# Altium PCB Avalon_ctrlunit.PcbDoc (part 5 of 6)
Units mil, origin at the board's own origin, x right, y up, seen from the top; angles counter-clockwise.
Board outline 3947.62 x 3160.22 mil, 4 copper layers (Top Layer, Mid-Layer 1, Mid-Layer 2, Bottom Layer); 194 components, 260 nets, 936 pads, 465 vias.
Unrouted connection lines stored in the file: 1.
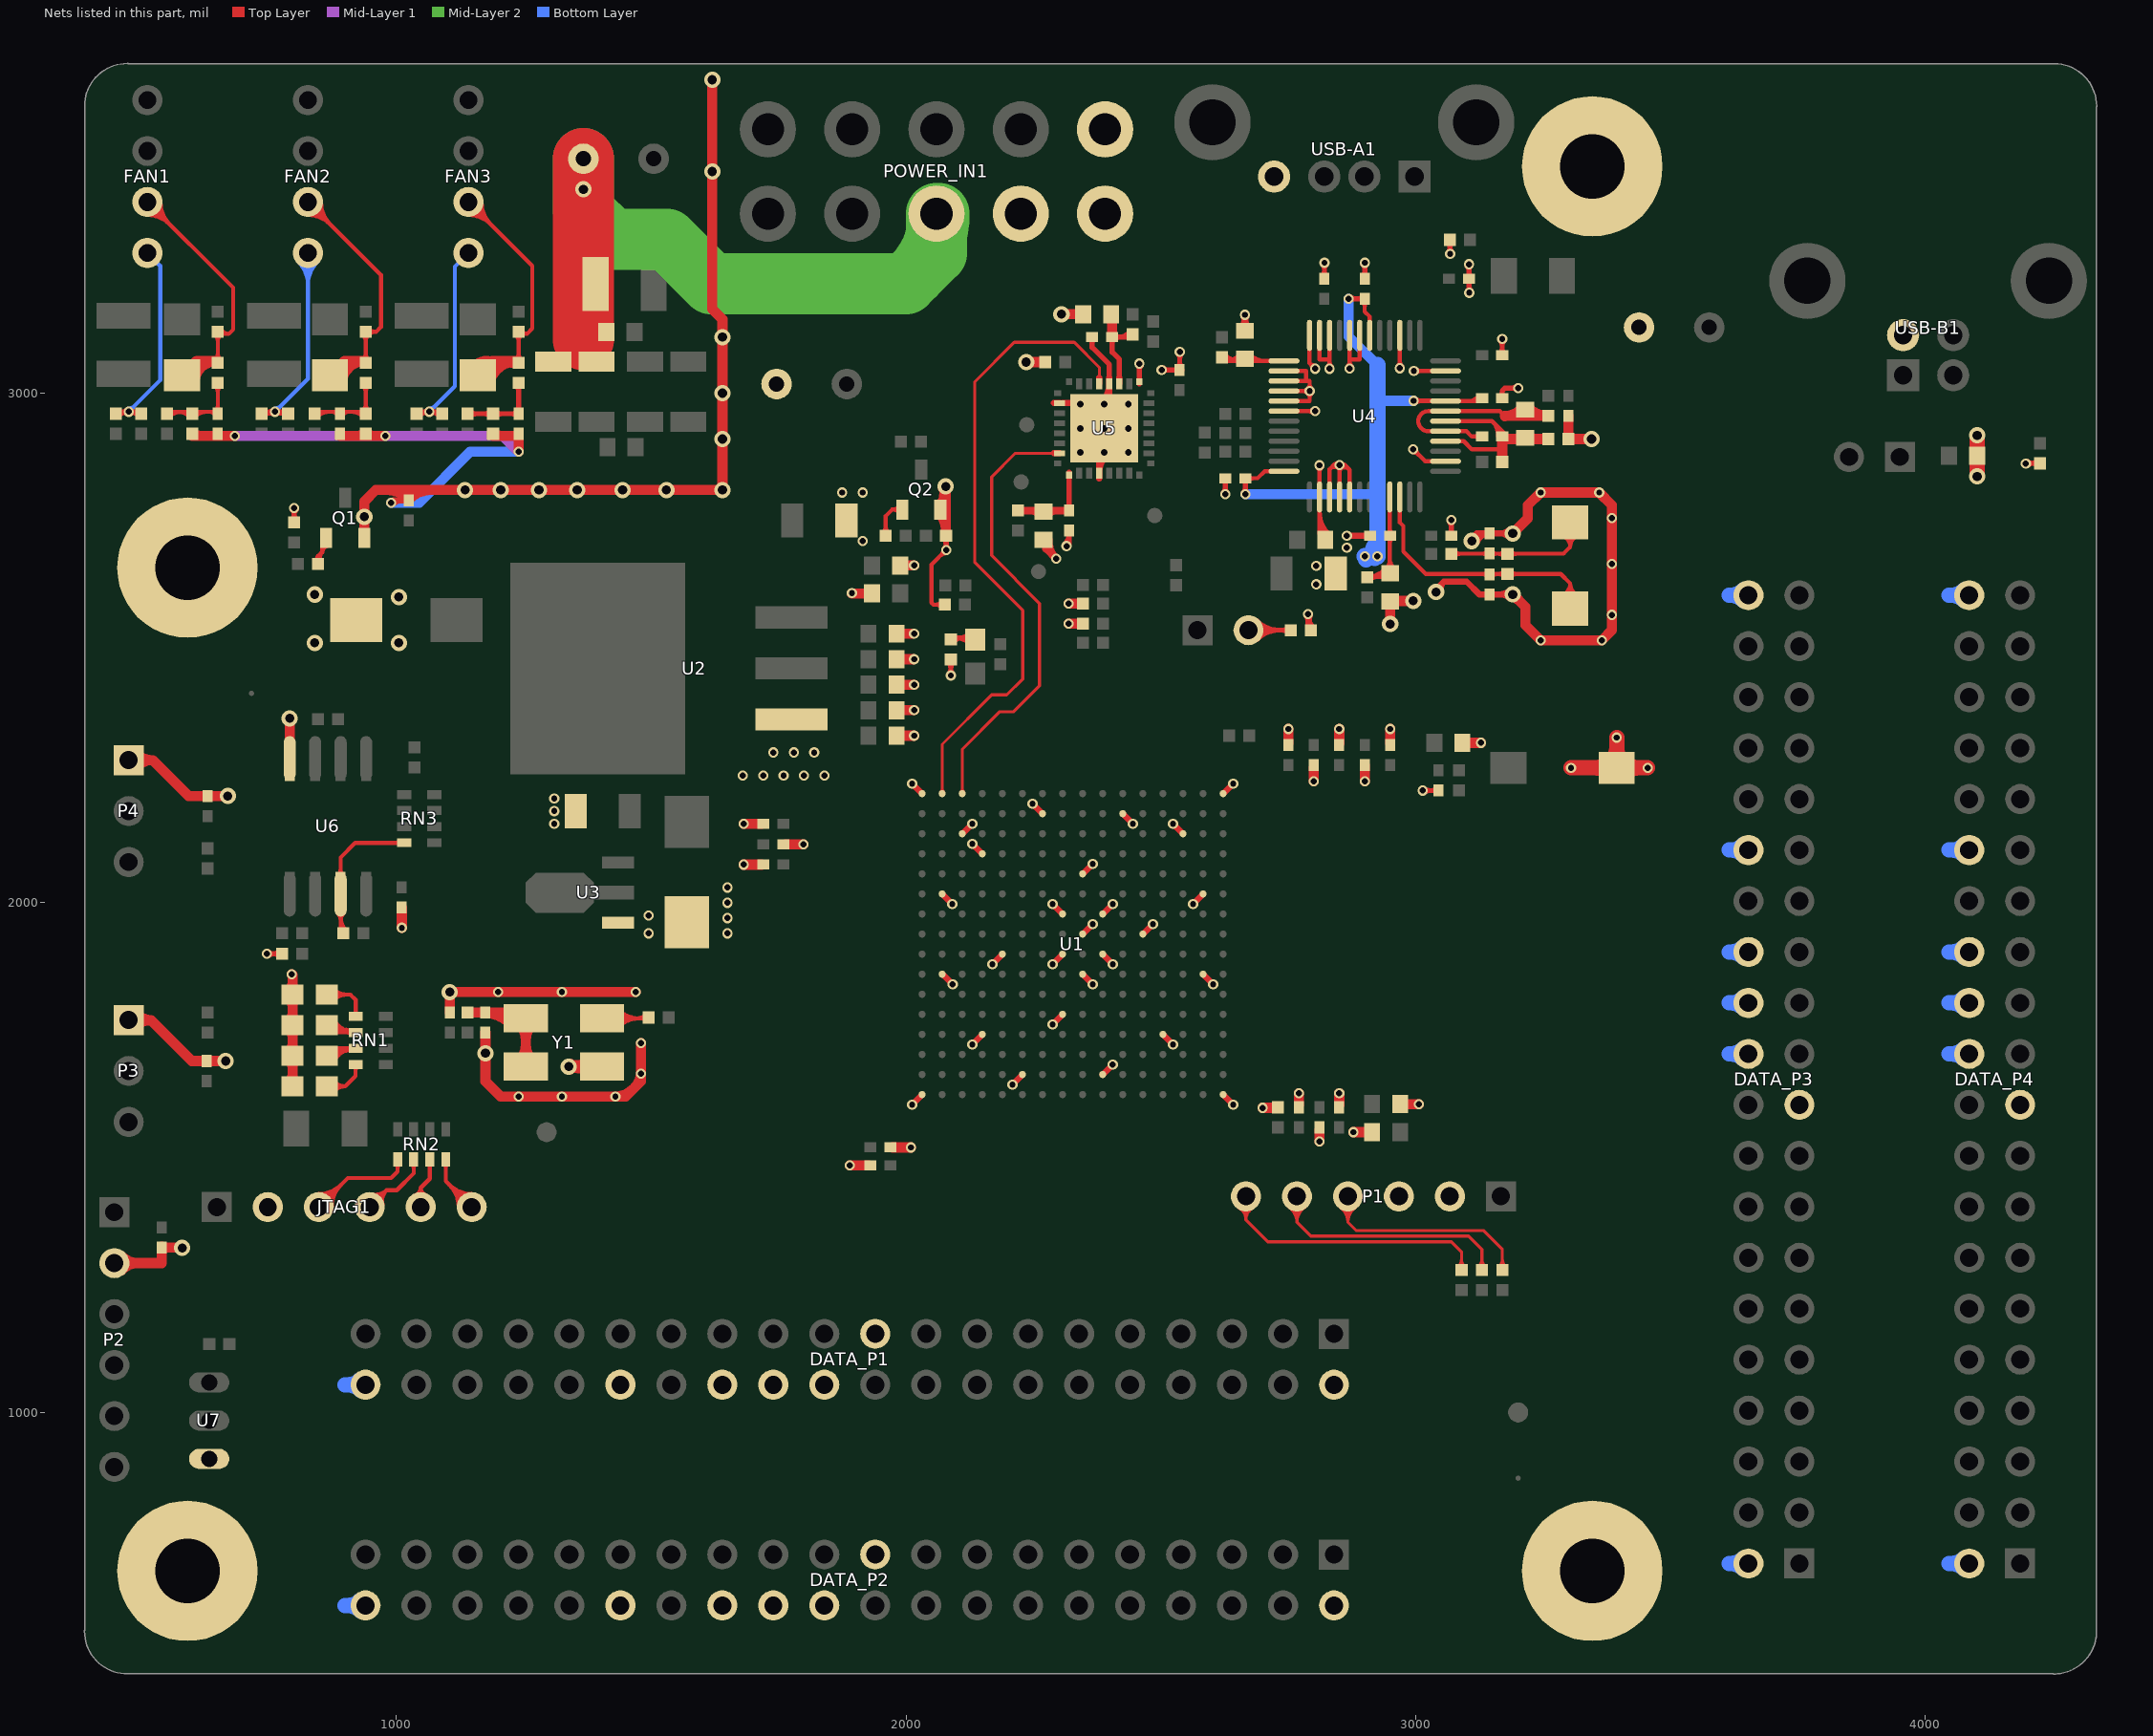
[diagram p7: the nets of this part, all layers, seen from the top]

## Via types
v1: diameter 20, hole 12, Top Layer to Bottom Layer, tented both sides, 334 vias
v2: diameter 32, hole 18, Top Layer to Bottom Layer, tented both sides, 84 vias
v3: diameter 50, hole 28, Top Layer to Bottom Layer, 32 vias
v4: diameter 25.98, hole 12.99, Top Layer to Bottom Layer, tented both sides, 9 vias
v5: diameter 50, hole 28, Top Layer to Bottom Layer, tented both sides, 6 vias

## Nets (pads, with @x,y where several pads share a name; then routed paths per layer and width w, separated by ;. In a path a pad name is that pad's centre, name@x,y a point inside that pad or via, vN(x,y) a via of type N, cw(c..) or ccw(c..) an arc to the next point about the centre after c; other vN are vias at no path point) (continued)
FPGA_T14: U1.T14 U5.31 | length 934.7
  Top Layer w6: U1.T14@2107.64,2217.1 ccw(c2100.81,2223.93) 2110.46,2223.93 ccw(c2120.12,2223.93) U1.T14@2113.29,2217.1 ; U1.T14@2110.46,2214.28 2110.46,2301.58 2183.89,2375 2211.44,2375 2262,2425.56 2262,2587.44 2168,2681.44 2168,2835.8 2214.2,2882 U5.31@2306.46,2882 ; 2288.99,2882 cw(c2288.99,2874.31) U5.31@2294.43,2879.75 ; 2289.94,2882 ccw(c2289.94,2888.34) U5.31@2294.43,2883.86
  Top Layer w11.81: 2290,2882.24 U5.31@2301.54,2882.24
FPGA_T15: U1.T15 U5.21 | length 1301.1
  Top Layer w6: U1.T15@2068.27,2217.1 ccw(c2061.44,2223.93) 2071.09,2223.93 ccw(c2080.75,2223.93) U1.T15@2073.92,2217.1 ; U1.T15@2071.09,2214.28 2071.09,2311.09 2168,2408 2197.77,2408 2229,2439.23 2229,2573.77 2135,2667.77 2135,3022.56 2212.44,3100 2330,3100 2379.29,3050.71 U5.21@2379.29,3014.13 ; U5.21@2377.1,3025.59 ccw(c2371.82,3030.87) 2379.29,3030.87 ; 2379.29,3030.23 ccw(c2385.85,3030.23) U5.21@2381.21,3025.59
  Top Layer w11.81: U5.21@2379.29,3019.05 2379.29,3030.59
GND: C1.2 C2.2 C3.2 C4.2 C5.2 C6.2 C7.2 C8.2 C9.2 C10.2 C11.2 C12.2 C13.2 C14.2 C15.1 C16.1 C17.1 C18.1 C19.1 C20.1 C21.1 C22.1 C23.1 C24.1 C25.1 C26.2 C27.1 C28.1 C29.1 C30.2 C31.1 C32.1 C33.1 C34.1 C35.1 C36.2 C37.2 C38.1 C39.1 C40.1 C43.2 C44.2 C45.1 C46.1 C47.1 C48.1 C49.2 C50.1 C51.1 C52.2 C53.1 C54.1 C55.1 C57.2 C59.1 C60.2 C61.2 C62.2 C64.2 C65.2 C67.1 C68.1 C69.2 C70.1 DATA_P1.2 DATA_P1.19 DATA_P1.22 DATA_P1.24 DATA_P1.26 DATA_P1.30 DATA_P1.40 DATA_P2.2 DATA_P2.19 DATA_P2.22 DATA_P2.24 DATA_P2.26 DATA_P2.30 DATA_P2.40 DATA_P3.2 DATA_P3.19 DATA_P3.22 DATA_P3.24 DATA_P3.26 DATA_P3.30 DATA_P3.40 DATA_P4.2 DATA_P4.19 DATA_P4.22 DATA_P4.24 DATA_P4.26 DATA_P4.30 DATA_P4.40 FB3.2 FB4.2 JTAG1.2 LED1.2 LED2.2 LED3.2 LED4.2 M1.0 M2.0 M3.0 M4.0 P1.2 P1.3 P2.2 P3.1 P4.1 POWER_IN1.5 POWER_IN1.8 POWER_IN1.9 POWER_IN1.10 PROG.1 Q1.2 Q2.2 R4.2 R5.2 R10.1 R13.2 R15.2 R22.1 R30.2 R33.1 R35.1 R36.1 R39.1 R46.2 R55.2 R56.2 R61.2 R66.2 U1.A1 U1.A16 U1.B7 U1.B11 U1.D4 U1.D13 U1.E9 U1.G2 U1.G8 U1.G15 U1.H7 U1.H9 U1.H12 U1.J5 U1.J8 U1.K7 U1.K9 U1.L2 U1.L15 U1.M8 U1.N13 U1.P3 U1.P14 U1.R6 U1.R10 U1.T1 U1.T16 U2.1 U3.1 U4.2 U4.3 U4.4 U4.5 U4.14 U4.23 U4.27 U4.31 U4.32 U4.34 U4.35 U4.36 U4.38 U4.39 U4.40 U4.41 U4.42 U5.4 U5.17 U5.20 U5.26 U5.33 U6.4 U7.1 USB-A1.4 USB-B1.4 Y1.2 | length 15794.8
  Top Layer w8: 2067.68,2681.31 cw(c2079,2669.99) v1@2079,2686 ; 2069.2,2682.83 ccw(c2060.04,2692) v1@2073,2692 ; R15.2@2070.79,2579.48 ccw(c2057.46,2566.14) 2057.46,2585 ccw(c2057.46,2603.86) R15.2@2070.79,2590.52 ; R15.2@2076.31,2585 2054,2585 2050,2589 2050,2663.63 v1@2078.68,2692.32 ; U4.42@2741.54,2964.84 v1(2803,2964.84) ; U4.41@2741.54,2984.53 2792,2984.53 v1(2792,3004.21) ; U4.40@2741.54,3004.21 v1(2792,3004.21) ; U4.39@2741.54,3023.9 2785,3023.9 ; U4.38@2741.54,3043.58 2785,3043.58 2785,3023.9 ; U4.36@2791.73,3113.46 2791.73,3059.27 v1(2803,3048) ; v1@2796.24,2999.97 ccw(c2806.49,2989.73) 2792,2989.73 ccw(c2777.51,2989.73) 2787.76,2999.97 ccw(c2777.51,2989.73) 2777.51,3004.21 ccw(c2777.51,3018.7) 2787.76,3008.46 ccw(c2777.51,3018.7) 2792,3018.7 ccw(c2806.49,3018.7) v1@2796.24,3008.46 ; v1@2797,3048 ccw(c2782.51,3048) 2792.76,3058.24 ccw(c2803,3068.49) v1@2803,3054 ; v1@2798.76,2960.6 ccw(c2788.51,2950.36) 2788.51,2964.84 ccw(c2788.51,2979.33) v1@2798.76,2969.09 ; v1@2807.17,2854.34 cw(c2796.93,2844.1) 2811.42,2844.1 cw(c2825.9,2844.1) v1@2815.66,2854.34 ; C39.1@2811.42,2724.14 U4.2@2811.42,2796.54 v1(2811.42,2858.58) ; 2811.42,2730.6 ccw(c2839.19,2730.6) C39.1@2819.55,2710.96 ; 2811.42,2749.92 ccw(c2858.51,2749.92) C39.1@2825.21,2716.62 ; U4.2@2811.42,2769.23 ccw(c2877.82,2769.23) C39.1@2830.87,2722.28 ; U4.35@2811.42,3113.46 2811.42,3066 2830,3066 ; v1@2826.86,3052.24 ccw(c2816.62,3062.49) 2831.1,3062.49 ccw(c2845.59,3062.49) v1@2835.34,3052.24 ; U4.3@2831.1,2796.54 2831.1,2851.1 ; v1(2831.1,3048) U4.34@2831.1,3113.46 ; 2838.94,2858.94 cw(c2846.74,2851.14) v1@2851.68,2861 ; v1@2845.38,2856.62 ccw(c2840,2854.03) 2840,2860 ; v1@2846.09,2862.94 cw(c2840,2867.77) 2840,2860 ; v1@2846.54,2854.97 cw(c2836.3,2844.73) 2850.79,2844.73 cw(c2865.27,2844.73) v1@2855.03,2854.97 ; v1@2848.1,2853.85 ccw(c2841.5,2840.7) 2831.1,2851.1 ; v1@2850.12,2861.1 cw(c2853.75,2850.78) 2861.48,2858.52 ; U4.4@2850.79,2796.54 v1(2850.79,2859.21) ; v1@2850.79,2860 2840,2860 ; v1@2852.78,2853.55 cw(c2858.43,2837.48) 2870.47,2849.53 ; v1@2860,2860 2870.47,2849.53 ; v1@2866.23,3052.72 ccw(c2855.99,3062.96) 2870.47,3062.96 ccw(c2884.96,3062.96) v1@2874.72,3052.72 ; U4.5@2870.47,2796.54 2870.47,2849.53 ; v1(2870.47,3048.47) 2870.47,3066 ; U4.32@2870.47,3113.46 2870.47,3066 ; U4.31@2890.16,3113.46 2890.16,3066 2870.47,3066 ; v1@2964.65,3053.14 ccw(c2954.41,3063.38) 2968.9,3063.38 ccw(c2983.38,3063.38) v1@2973.14,3053.14 ; v1(2968.9,3048.9) U4.27@2968.9,3113.46 ; v1@2995,2884 cw(c2995,2869.51) 3005.24,2879.76 cw(c3015.49,2890) v1@3001,2890 ; v1(2995,2890) 3018.58,2866.42 U4.14@3058.46,2866.42 ; v1(2996.42,3043.58) U4.23@3058.46,3043.58 ; v1@3000.66,3039.34 cw(c3010.9,3029.1) 3010.9,3043.58 cw(c3010.9,3058.07) v1@3000.66,3047.83 ; 2785,3023.9 2792,3023.9 v1(2792,3004.21) ; 2831.1,2851.1 2840,2860
  Top Layer w10: v1(746,1900) R56.2@772.38,1900 ; v1@749.54,1896.46 cw(c758.07,1887.93) 758.07,1900 cw(c758.07,1912.07) v1@749.54,1903.54 ; R56.2@771.5,1895.18 ccw(c759.87,1883.56) 759.87,1900 ccw(c759.87,1916.44) R56.2@771.5,1904.82 ; R10.1@795.18,2751.5 ccw(c783.56,2763.13) 800,2763.13 ccw(c816.44,2763.13) R10.1@804.82,2751.5 ; v1@796.15,2771.15 cw(c786.85,2761.85) 800,2761.85 ; R10.1@800,2746.68 v1@800,2774.37 ; 800,2763.37 cw(c811,2763.37) v1@803.22,2771.15 ; R22.1@2073.87,2715.18 cw(c2062.24,2703.56) 2078.68,2703.56 cw(c2095.13,2703.56) R22.1@2083.5,2715.18 ; v1@2075.46,2695.54 ccw(c2067.69,2703.31) 2078.69,2703.31 ; v1@2078.68,2692.32 R22.1@2078.68,2720 ; 2078.68,2704.83 ccw(c2091.83,2704.83) v1@2082.54,2695.54 ; R55.2@2083.18,2472.5 cw(c2071.56,2460.87) 2088,2460.87 cw(c2104.44,2460.87) R55.2@2092.82,2472.5 ; v1@2084.46,2449.54 ccw(c2075.93,2458.07) 2088,2458.07 ccw(c2100.07,2458.07) v1@2091.54,2449.54 ; v1@2088,2442 R55.2@2088,2477.31 ; v1@2311.46,2703.54 ccw(c2290.86,2724.14) C54.1@2320,2724.14 ; v1(2315,2700) 2320,2705 C54.1@2320,2730.32 ; C54.1@2316.58,2724.92 cw(c2308.31,2716.66) 2320,2716.66 cw(c2331.69,2716.66) C54.1@2323.42,2724.92 ; C53.1@2361.89,3106.58 cw(c2353.62,3098.31) 2365.32,3098.31 cw(c2377.01,3098.31) C53.1@2368.74,3106.58 ; C53.1@2365.32,3110 2365.32,3089.68 2398.98,3056.02 2398.98,3030.59 ; v1@2454.5,3054.5 cw(c2445.96,3045.96) 2458.03,3045.96 cw(c2470.1,3045.96) v1@2461.57,3054.5 ; U5.17@2458.03,3018.07 v1(2458.03,3058.03) ; v1(2501.52,3045.82) C55.1@2541.48,3045.82 ; v1@2505.06,3042.28 cw(c2513.59,3033.75) 2513.59,3045.82 cw(c2513.59,3057.89) v1@2505.06,3049.35 ; 2524.99,3045.82 cw(c2524.99,3033.67) C55.1@2533.58,3042.26 ; 2525.63,3045.82 ccw(c2525.63,3057.05) C55.1@2533.58,3049.11 ; C55.1@2533.58,3051.08 ccw(c2524.99,3059.67) 2537.13,3059.67 ; v1@2533.6,3077.63 cw(c2525.06,3069.09) 2537.13,3069.09 cw(c2549.21,3069.09) v1@2540.67,3077.63 ; C55.1@2537.13,3041.2 v1(2537.13,3081.17) ; 2537.13,3059.02 ccw(c2548.37,3059.02) C55.1@2540.42,3051.08 ; v1@2622.78,2805.22 ccw(c2614.24,2813.76) 2626.32,2813.76 ccw(c2638.39,2813.76) v1@2629.85,2805.22 ; C35.1@2622.89,2829.58 cw(c2614.62,2821.31) 2626.32,2821.31 cw(c2638.01,2821.31) C35.1@2629.74,2829.58 ; v1@2626.32,2797.69 C35.1@2626.32,2833 ; C45.1@2657.4,3130.16 ccw(c2639.05,3148.51) 2665,3148.51 ccw(c2690.95,3148.51) C45.1@2672.6,3130.16 ; v1@2660.67,3151.37 cw(c2646.11,3142.97) 2662.35,3138.62 ; v1@2661.46,3150.34 cw(c2652.93,3141.8) 2665,3141.8 cw(c2677.07,3141.8) v1@2668.54,3150.34 ; C45.1@2665,3122.56 v1@2665,3157.87 ; 2667.65,3138.62 cw(c2683.89,3142.97) v1@2669.33,3151.37 ; v1@2785.15,2562.78 cw(c2776.61,2554.24) 2788.69,2554.24 cw(c2800.76,2554.24) v1@2792.22,2562.78 ; v1@2786.19,2561.98 cw(c2780.32,2551.83) 2791.65,2554.86 ; R66.2@2788.69,2535 v1@2788.69,2570.31 ; v1@2788.69,2565.93 ccw(c2825.61,2565.93) R66.2@2799.5,2539.82 ; 2791.78,2554.4 cw(c2803.76,2557.61) v1@2793.02,2563.81 ; v1@2817.46,3252.46 cw(c2808.93,3243.93) 2821,3243.93 cw(c2833.07,3243.93) v1@2824.54,3252.46 ; C48.1@2817.58,3230.08 ccw(c2809.31,3238.34) 2821,3238.34 ccw(c2832.69,3238.34) C48.1@2824.42,3230.08 ; C48.1@2821,3224.68 v1@2821,3260 ; v1@2896.46,3252.46 cw(c2887.93,3243.93) 2900,3243.93 cw(c2912.07,3243.93) v1@2903.54,3252.46 ; C33.1@2896.58,3230.08 ccw(c2888.31,3238.34) 2900,3238.34 ccw(c2911.69,3238.34) C33.1@2903.42,3230.08 ; C33.1@2900,3224.68 v1@2900,3260 ; v1@3009.69,2220.31 C64.2@3045,2220.31 ; v1@3017.22,2216.78 cw(c3025.76,2208.24) 3025.76,2220.31 cw(c3025.76,2232.39) v1@3017.22,2223.85 ; C64.2@3041.58,2216.89 ccw(c3033.31,2208.62) 3033.31,2220.31 ccw(c3033.31,2232.01) C64.2@3041.58,2223.74 ; R5.2@3062.5,3296.18 cw(c3050.87,3284.56) 3067.31,3284.56 cw(c3083.76,3284.56) R5.2@3072.13,3296.18 ; v1@3064.09,3276.54 ccw(c3056.32,3284.31) 3067.31,3284.31 ; v1@3066.15,2747.78 cw(c3057.61,2739.24) 3069.68,2739.24 cw(c3081.76,2739.24) v1@3073.22,2747.78 ; C46.1@3066.26,2723.42 ccw(c3057.99,2731.69) 3069.68,2731.69 ccw(c3081.38,2731.69) C46.1@3073.11,2723.42 ; v1@3067.31,3273.32 R5.2@3067.31,3301 ; 3067.31,3285.83 ccw(c3080.46,3285.83) v1@3071.17,3276.54 ; C46.1@3069.68,2720 v1@3069.68,2755.31 ; v1@3100.83,3249.46 cw(c3091.54,3240.17) 3104.69,3240.17 ; C30.2@3101.26,3221.58 cw(c3092.99,3213.31) 3104.69,3213.31 cw(c3116.38,3213.31) C30.2@3108.11,3221.58 ; C30.2@3101.26,3228.42 ccw(c3092.99,3236.69) 3104.69,3236.69 ccw(c3116.38,3236.69) C30.2@3108.11,3228.42 ; v1@3101.46,3200.54 ccw(c3093.69,3208.31) 3104.69,3208.31 ; v1@3104.69,3197.32 C30.2@3104.69,3225 v1@3104.69,3252.68 ; 3104.69,3209.83 ccw(c3117.83,3209.83) v1@3108.54,3200.54 ; 3104.69,3241.69 cw(c3115.68,3241.69) v1@3107.91,3249.46 ; v1@3166.15,3102.78 cw(c3157.61,3094.24) 3169.68,3094.24 cw(c3181.76,3094.24) v1@3173.22,3102.78 ; C32.1@3166.26,2993.42 ccw(c3157.99,3001.69) 3169.68,3001.69 ccw(c3181.38,3001.69) C32.1@3173.11,2993.42 ; C47.1@3166.26,3078.42 ccw(c3157.99,3086.69) 3169.68,3086.69 ccw(c3181.38,3086.69) C47.1@3173.11,3078.42 ; C32.1@3169.68,2990 3169.68,3004.68 3175,3010 v1(3201.31,3010) ; C47.1@3169.68,3075 v1@3169.68,3110.31 ; v1@3197.78,3006.46 ccw(c3189.24,2997.93) 3189.24,3010 ccw(c3189.24,3022.07) v1@3197.78,3013.54 ; v1@4197.32,2862.31 R4.2@4225,2862.31 ; v1@4200.54,2858.46 cw(c4209.83,2849.17) 4209.83,2862.31 ; v1@4200.54,2865.54 ccw(c4208.31,2873.31) 4208.31,2862.31 ; R4.2@4220.18,2857.5 ccw(c4208.56,2845.87) 4208.56,2862.31 ccw(c4208.56,2878.76) R4.2@4220.18,2867.13
  Top Layer w11.81: 2290,2980.67 U5.26@2301.54,2980.67 ; U5.4@2379.16,2842.9 cw(c2429.87,2842.9) U5.33@2394.01,2878.76 ; U5.33@2379.16,2871.42 cw(c2401.36,2871.42) U5.33@2385.66,2887.11 ; 2379.29,2832.32 U5.4@2379.29,2843.86 ; U5.33@2384.03,2983.32 ccw(c2349.37,3018.61) U5.20@2398.84,3018.61 ; U5.33@2392.31,2974.89 ccw(c2377.02,2990.46) U5.33@2398.84,2990.46 ; U5.20@2398.98,3019.05 2398.98,3030.59
  Top Layer w12: v1(990,2785) 994.68,2789.68 C70.1@1025,2789.68 ; v1@992.83,2782.17 cw(c1010.97,2764.03) 1010.97,2789.68 ; v1(2012.04,1604.04) U1.A16@2031.72,1623.72 ; v1(2012.04,2233.96) U1.T16@2031.72,2214.28 ; U1.L15@2071.09,2017.43 v1(2090.78,1997.74) ; U1.G15@2072,1860 v1(2091.69,1840.31) ; U1.P14@2110.46,2135.54 v1(2130.15,2155.22) ; v1(2130.15,1722.15) U1.D13@2149.83,1741.83 ; v1(2130.15,2115.85) U1.N13@2149.83,2096.17 ; v1(2169.52,1879.63) U1.H12@2189.2,1899.32 ; v1(2208.89,1643.41) U1.B11@2228.57,1663.09 ; v1(2248.26,2194.59) U1.R10@2267.94,2174.91 ; v1(2287.63,1761.52) U1.E9@2307.32,1781.2 ; v1(2287.63,1879.63) U1.H9@2307.32,1899.32 ; v1(2287.63,1997.74) U1.K9@2307.32,1978.06 ; U5.26@2306.46,2980.67 U5.33@2339.92,2980.67 ; 2319.06,2980.67 cw(c2319.06,2955.56) U5.33@2336.81,2973.32 ; U1.G8@2346.68,1859.94 v1(2366.37,1840.26) ; U1.J8@2346.68,1938.68 v1(2366.37,1958.37) ; U1.M8@2346.68,2056.8 v1(2366.37,2076.48) ; U1.B7@2386,1663 v1(2405.69,1682.69) ; U1.H7@2386.06,1899.32 v1(2405.74,1879.63) ; U1.K7@2386.06,1978.06 v1(2405.74,1997.74) ; U1.R6@2425.43,2174.91 v1(2445.11,2155.22) ; U1.J5@2464.8,1938.68 v1(2484.48,1958.37) ; U1.D4@2504.17,1741.83 v1(2523.85,1722.15) ; v1(2523.85,2155.22) U1.P3@2543.54,2135.54 ; v1(2563.22,1997.74) U1.L2@2582.91,2017.43 ; U1.G2@2582.91,1859.94 v1(2602.59,1840.26) ; U1.A1@2622.28,1623.72 v1(2641.96,1604.04) ; U1.T1@2622.28,2214.28 v1(2641.96,2233.96) ; v1(2865,2720) C31.1@2910.32,2720 ; v2(3040,2610) 3040,2615.32 3055,2630.32 ; v2@3049.76,2612.2 cw(c3068.82,2616.5) 3055,2630.31 ; v2@3108.12,2710.67 cw(c3127.99,2703.59) 3127.99,2724.69 ; v2(3110,2710) 3105,2710 3119.69,2724.69 ; v2@3118.54,2715.2 cw(c3125.16,2719.21) 3119.68,2724.68 ; v2@3119.42,2706.64 cw(c3145,2697.53) C37.2@3145,2724.69 ; v2@3183.24,2598.24 ccw(c3166.17,2581.17) 3166.17,2605.31 ccw(c3166.17,2629.46) v2@3183.24,2612.39 ; v2@3183.24,2717.61 ccw(c3166.17,2700.54) 3166.17,2724.69 ccw(c3166.17,2748.83) v2@3183.24,2731.76 ; v2(3190.32,2605.31) C36.2@3145,2605.31 3124.69,2605.31 3099.68,2630.32 3055,2630.32 ; v2(3190.31,2724.69) C37.2@3145,2724.69 ; 3119.69,2724.69 C37.2@3145,2724.69
  Top Layer w15: C68.1@2268.48,2704.97 cw(c2263.72,2694.74) 2275,2694.74 ; C68.1@2275,2712.44 2275,2695 v1(2295,2675) cw(c2330.74,2710.75) C68.1@2280.21,2712.2
  Top Layer w20: P2.2@447,1293 540,1293 C69.2@540,1325.31 ; P2.2@460.81,1279.19 cw(c494.14,1245.86) 494.14,1293 cw(c494.14,1340.14) P2.2@460.81,1306.81 ; P3.1@475,1770 519,1770 ; P4.1@475,2280 522,2280 ; P4.1@488.84,2266.22 cw(c522,2233.21) 522,2280 ; P4.1@488.84,2293.78 ccw(c522,2326.79) 522,2280 ; P3.1@489.48,1756.9 cw(c519,1730.2) 519,1770 ; P3.1@489.48,1783.1 ccw(c519,1809.8) 519,1770 ; C69.2@540,1323.31 v2@579.69,1323.31 ; v2@579.69,1320.31 v2@580,1320 ; R61.2@600,2916.38 650,2916.38 v1(683.62,2916.38) ; R61.2@601.28,2921.6 ccw(c613.88,2934.19) 613.88,2916.38 ; v2(665.31,1689.69) 599.31,1689.69 519,1770 ; v2(669.69,2209.69) 592.31,2209.69 522,2280 ; LED1.2@789.69,1646.85 ccw(c773.15,1663.38) 796.54,1663.38 ccw(c819.92,1663.38) LED1.2@803.38,1646.85 ; LED2.2@789.69,1693.15 cw(c773.15,1676.62) 796.54,1676.62 cw(c819.92,1676.62) LED2.2@803.38,1693.15 ; LED2.2@789.69,1706.85 ccw(c773.15,1723.38) 796.54,1723.38 ccw(c819.92,1723.38) LED2.2@803.38,1706.85 ; LED3.2@789.69,1753.15 cw(c773.15,1736.62) 796.54,1736.62 cw(c819.92,1736.62) LED3.2@803.38,1753.15 ; LED3.2@789.69,1766.85 ccw(c773.15,1783.38) 796.54,1783.38 ccw(c819.92,1783.38) LED3.2@803.38,1766.85 ; LED4.2@789.69,1813.15 cw(c773.15,1796.62) 796.54,1796.62 cw(c819.92,1796.62) LED4.2@803.38,1813.15 ; LED4.2@789.69,1826.85 ccw(c773.15,1843.38) 796.54,1843.38 ccw(c819.92,1843.38) LED4.2@803.38,1826.85 ; U6.4@791,2283.86 v2(791,2362) ; v1(795,1860) 796.54,1858.46 LED4.2@796.54,1820 LED3.2@796.54,1760 LED2.2@796.54,1700 LED1.2@796.54,1640 ; C60.2@890,2916.38 940,2916.38 v1(978.62,2916.38) ; 926.12,2916.38 ccw(c926.12,2934.19) R46.2@938.72,2921.6 ; Q1.2@937.4,2715.63 v2(937.4,2757.4) 937.4,2787.4 960,2810 v2(1135,2810) v2(1205,2810) v2(1280,2810) v2(1355,2810) v2@1525,2810 ; R46.2@941.28,2921.6 ccw(c953.88,2934.19) 953.88,2916.38 ; 981.09,2810 cw(c981.09,2747.74) C70.1@1025.11,2791.76 ; v1(1011,1951) C59.1@1011,1990.32 ; C70.1@1024.89,2791.76 cw(c1068.91,2747.74) 1068.91,2810 ; C28.1@1105,1784.68 v2(1105,1825) v1(1470,1825) ; C29.1@1175,1745.32 v2(1175,1705) 1175,1650 1205,1620 1450,1620 1480,1650 v1(1480,1665) ; R30.2@1190,2916.38 1240,2916.38 v1(1240,2885) ; R30.2@1191.28,2921.6 ccw(c1203.88,2934.19) 1203.88,2916.38 ; v2(1338.26,1678.74) Y1.2@1403.82,1678.74 ; v2@1341.26,1673.54 cw(c1351.78,1655.32) 1357.23,1675.65 ; v2@1341.26,1683.94 ccw(c1351.78,1702.16) 1357.23,1681.83 ; Y1.2@1375.65,1666.32 ccw(c1345.68,1636.35) 1345.68,1678.74 ccw(c1345.68,1721.13) Y1.2@1375.65,1691.16 ; v1(1430,1620) ccw(c1430,1668.28) 1464.14,1634.14 ; 1469.39,1639.39 ccw(c1443.79,1665) v1(1480,1665) ; v1(1480,1725) v1(1480,1665) ; v2(1530,2810) v2(1640,2810) ; v2(1620,3615) 1620,3165 1640,3145 v2(1640,3110) v2(1640,3000) v2(1640,2910) v2@1640,2815 ; v1(1682,2075) C11.2@1716.38,2075 ; v1(1682,2155) C13.2@1716.38,2155 ; C12.2@1763.62,2115 v1(1799,2115) ; v1(1890,1485) C8.2@1926.38,1485 ; v1@1894,2607 C20.1@1933.44,2607 ; C9.2@1973.62,1520 v1(2010,1520) ; C21.1@1981.56,2328 v1(2016,2328) ; C25.1@1981.56,2378 v1(2016,2378) ; C22.1@1981.56,2428 v1(2016,2428) ; C23.1@1981.56,2478 v1@2014,2478 ; C24.1@1981.56,2528 v1@2011.69,2528 ; C19.1@1988.56,2662 v1(2016,2662) ; Q2.2@2066.12,2762.48 cw(c2037.44,2733.8) 2078,2733.8 ; Q2.2@2066.12,2780.78 ccw(c2037.44,2809.46) v2@2078,2809.46 ; v2@2072.8,2814 cw(c2054.49,2803.43) 2074.92,2797.95 ; v2(2078,2817) 2078,2720.68 R22.1@2078.68,2720 ; v2(2236,3061) R35.1@2275.32,3061 ; v2(2305,3155) C67.1@2347.44,3155 ; v1(2319,2548) R36.1@2343.38,2548 ; v1(2319,2587) R33.1@2343.38,2587 ; v1(2699.62,1597.62) R39.1@2730,1597.62 ; C1.2@2750,2313.62 v1(2750,2341) ; C10.2@2771,1604 v1(2771,1626.38) ; v1(2800,2238.62) C5.2@2800,2265 ; v1(2811,1531.62) C4.2@2811,1554 ; C3.2@2850,1604 v1(2850,1626.38) ; C6.2@2850,2313.62 v1(2850,2341) ; v1(2878.06,1550) C17.1@2914.44,1550 ; v1(2900,2238.62) C7.2@2900,2270 ; C2.2@2950,2313.62 v1(2950,2341) ; v2(2950,2547.13) 2950,2592.44 v2(2995.31,2592.44) ; C34.1@2956.03,2587.38 cw(c2968.26,2575.15) 2968.26,2592.44 ; C18.1@2969.56,1605 v1(3005.94,1605) ; C16.1@3091.56,2314 v1(3127.94,2314) ; v2(3190.32,2605.31) 3215,2580.63 3215,2545 v1(3245,2515) v1(3365,2515) 3385,2535 3385,2780 v1(3360,2805) v1(3245,2805) 3220,2780 3220,2754.37 v2(3190.31,2724.69) ; C40.1@3299.69,2955.32 R13.2@3299.69,2910 v2(3345,2910)
  Top Layer w30: v1(3304.7,2265) PROG.1@3364,2265 ; PROG.1@3378.7,2253.34 ccw(c3350.54,2225.18) 3350.54,2265 ccw(c3350.54,2304.82) PROG.1@3378.7,2276.66 ; PROG.1@3382.63,2276.66 ccw(c3354.47,2304.82) 3394.3,2304.82 ccw(c3434.12,2304.82) PROG.1@3405.96,2276.66 ; v1(3394.3,2324.3) PROG.1@3394.3,2265 v1(3455,2265) ; PROG.1@3409.9,2253.34 cw(c3438.06,2225.18) 3438.06,2265 cw(c3438.06,2304.82) PROG.1@3409.9,2276.66 ; v2(4101.56,2836.56) C52.2@4101.56,2877 v2(4101.56,2917.44)
  Top Layer w120: 1367.2,3105 C49.2@1367.2,3460
  Mid-Layer 1 w20: v1(683.62,2916.38) v1(978.62,2916.38) 1208.62,2916.38 v1@1235,2890
  Mid-Layer 2 w120: C49.2@1367.2,3460 1367.2,3357.8 1423,3302 1531,3302 1618,3215 2000,3215 2059.91,3274.91 POWER_IN1.8@2059.91,3352.32 ; 2013.5,3228.5 ccw(c1889.67,3352.32) POWER_IN1.8@2064.79,3352.32
  Bottom Layer w20: v1(990,2785) 1045,2785 1145,2885 v1(1240,2885)
  Bottom Layer w30: 899,621.29 DATA_P2.40@939.76,621.29 ; 899,1054.36 DATA_P1.40@939.76,1054.36 ; DATA_P2.40@929.49,611.02 ccw(c904.69,586.22) 904.69,621.29 ccw(c904.69,656.36) DATA_P2.40@929.49,631.56 ; DATA_P1.40@929.49,1044.09 ccw(c904.69,1019.29) 904.69,1054.36 ccw(c904.69,1089.43) DATA_P1.40@929.49,1064.63 ; 3615,703.54 DATA_P3.2@3652.79,703.54 ; 3615,1703.54 DATA_P3.22@3652.79,1703.54 ; 3615,1803.54 DATA_P3.24@3652.79,1803.54 ; 3615,1903.54 DATA_P3.26@3652.79,1903.54 ; 3615,2103.54 DATA_P3.30@3652.79,2103.54 ; 3615,2603.54 DATA_P3.40@3652.79,2603.54 ; DATA_P3.2@3642.51,693.27 ccw(c3617.71,668.47) 3617.71,703.54 ccw(c3617.71,738.62) DATA_P3.2@3642.51,713.82 ; DATA_P3.22@3642.51,1693.27 ccw(c3617.71,1668.47) 3617.71,1703.54 ccw(c3617.71,1738.62) DATA_P3.22@3642.51,1713.82 ; DATA_P3.24@3642.51,1793.27 ccw(c3617.71,1768.47) 3617.71,1803.54 ccw(c3617.71,1838.62) DATA_P3.24@3642.51,1813.82 ; DATA_P3.26@3642.51,1893.27 ccw(c3617.71,1868.47) 3617.71,1903.54 ccw(c3617.71,1938.62) DATA_P3.26@3642.51,1913.82 ; DATA_P3.30@3642.51,2093.27 ccw(c3617.71,2068.47) 3617.71,2103.54 ccw(c3617.71,2138.62) DATA_P3.30@3642.51,2113.82 ; DATA_P3.40@3642.51,2593.27 ccw(c3617.71,2568.47) 3617.71,2603.54 ccw(c3617.71,2638.62) DATA_P3.40@3642.51,2613.82 ; 4046,703.54 DATA_P4.2@4085.86,703.54 ; 4046,1703.54 DATA_P4.22@4085.86,1703.54 ; 4046,1803.54 DATA_P4.24@4085.86,1803.54 ; 4046,1903.54 DATA_P4.26@4085.86,1903.54 ; 4046,2103.54 DATA_P4.30@4085.86,2103.54 ; 4046,2603.54 DATA_P4.40@4085.86,2603.54 ; DATA_P4.2@4075.59,693.27 ccw(c4050.79,668.47) 4050.79,703.54 ccw(c4050.79,738.62) DATA_P4.2@4075.59,713.82 ; DATA_P4.22@4075.59,1693.27 ccw(c4050.79,1668.47) 4050.79,1703.54 ccw(c4050.79,1738.62) DATA_P4.22@4075.59,1713.82 ; DATA_P4.24@4075.59,1793.27 ccw(c4050.79,1768.47) 4050.79,1803.54 ccw(c4050.79,1838.62) DATA_P4.24@4075.59,1813.82 ; DATA_P4.26@4075.59,1893.27 ccw(c4050.79,1868.47) 4050.79,1903.54 ccw(c4050.79,1938.62) DATA_P4.26@4075.59,1913.82 ; DATA_P4.30@4075.59,2093.27 ccw(c4050.79,2068.47) 4050.79,2103.54 ccw(c4050.79,2138.62) DATA_P4.30@4075.59,2113.82 ; DATA_P4.40@4075.59,2593.27 ccw(c4050.79,2568.47) 4050.79,2603.54 ccw(c4050.79,2638.62) DATA_P4.40@4075.59,2613.82
  other v1: 1240,1620 1325,1620 1200,1825 1325,1825 1495,1940 1650,1940 1650,1970 1495,1975 1650,2000 1650,2030 1310,2155 1310,2180 1310,2205 3013.69,2220.31 1680,2250 1720,2250 1760,2250 1800,2250 1840,2250 1740,2295 1780,2295 1820,2295 2088,2446 2016,2478 2016,2528 3385,2565 2788.69,2566.31 1894,2608 2805,2625 2805,2661 3385,2665 2079,2692 2865,2697 1915,2710 3069.68,2751.31 3385,2755 799.68,2774.68 2626.32,2801.69 1875,2805 1915,2805 4197,2862 3169.68,3106.31 2665,3153.87 3105,3197 3104.37,3253 2821,3256 2900,3256 3067.63,3273
  other v2: 580,1323 840,2510 1005,2510 1005,2600 840,2605 1444,2810 1367.2,3400 1620,3435
  other v4: 2341.76,2883.77 2389,2883.77 2436.24,2883.77 2341.76,2931.02 2389,2931.02 2436.24,2931.02 2341.76,2978.26 2389,2978.26 2436.24,2978.26
HOLD_A: R47.2 RN3.4 U6.7 | length 452.5
  Top Layer w8: U6.7@885.48,1979.12 cw(c872.14,1965.79) 891,1965.79 cw(c909.86,1965.79) U6.7@896.52,1979.12 ; U6.7@885.48,2053.16 ccw(c872.14,2066.5) 891,2066.5 ccw(c909.86,2066.5) U6.7@896.52,2053.16 ; U6.7@886.87,2031.86 cw(c876.89,2021.89) 891,2021.89 cw(c905.11,2021.89) U6.7@895.13,2031.86 ; U6.7@886.87,2055.44 ccw(c876.89,2065.42) 891,2065.42 ccw(c905.11,2065.42) U6.7@895.13,2055.44 ; R47.2@891,1935.38 U6.7@891,2016.14 U6.7@891,2043.65 891,2046.65 891,2089 919.76,2117.76 RN3.4@1013,2117.76 ; 891,1952.38 ccw(c908.69,1952.38) R47.2@896.18,1939.87 ; 891,1971.69 ccw(c928,1971.69) R47.2@901.84,1945.52 ; 998.47,2117.76 ccw(c998.47,2130.35) RN3.4@1007.37,2121.44 ; 999.68,2117.76 cw(c999.68,2106.89) RN3.4@1007.37,2114.57
NetC29_2: C29.2 R1.1 Y1.1 Y1.4 | length 399.4
  Top Layer w20: R1.1@1145,1784.68 Y1.4@1252.76,1784.68 ; C29.2@1168.41,1784.69 cw(c1168.41,1703.18) Y1.4@1226.05,1760.81 ; Y1.1@1241.8,1691.16 ccw(c1211.82,1721.13) 1254.21,1721.13 ccw(c1296.6,1721.13) Y1.1@1266.63,1691.16 ; Y1.4@1241.8,1760.81 cw(c1211.82,1730.84) 1254.21,1730.84 cw(c1296.6,1730.84) Y1.4@1266.63,1760.81 ; Y1.1@1254.21,1678.74 Y1.4@1254.21,1773.23
NetC31_2: C31.2 C32.2 C33.2 C34.2 C35.2 R8.1 U4.9 U4.20 U4.30 U4.48 | length 1857.5
  Top Layer w8: C35.2@2665.69,2833 2690,2833 2703.73,2846.73 U4.48@2741.54,2846.73 ; C35.2@2671.78,2828.87 cw(c2681.76,2818.9) 2681.76,2833 cw(c2681.76,2847.11) C35.2@2671.78,2837.13 ; C33.2@2895.87,3179.22 cw(c2885.9,3169.24) 2900,3169.24 cw(c2914.11,3169.24) C33.2@2904.13,3179.22 ; C33.2@2900,3185.31 2900,3160 2909.84,3150.16 U4.30@2909.84,3113.46 ; R8.1@2910.52,2633.16 cw(c2926.27,2617.41) 2926.27,2639.68 ; R8.1@2910.52,2644.21 ccw(c2921.44,2655.13) 2921.44,2639.68 ; 2923.49,2639.68 ccw(c2923.49,2669.6) C34.2@2945.3,2649.12 ; C34.2@2939.47,2654.6 cw(c2905,2686.96) 2905,2639.68 2942.13,2639.68 2949.21,2646.77 U4.9@2949.21,2796.54 ; C34.2@2941.69,2654.87 ccw(c2923.54,2673.02) 2949.21,2673.02 ; C31.2@2945.55,2715.87 cw(c2936.72,2707.04) 2949.21,2707.04 ; C31.2@2945.55,2724.13 ccw(c2936.72,2732.96) 2949.21,2732.96 ; 2949.21,2676.82 ccw(c2980.26,2676.82) C34.2@2958.31,2654.87 ; 2949.21,2704.75 cw(c2964.93,2704.75) C31.2@2953.82,2715.87 ; 2949.21,2735.25 ccw(c2964.93,2735.25) C31.2@2953.82,2724.13 ; U4.20@3058.46,2984.53 3124.84,2984.53 ccw(c3124.84,2990) C32.2@3130.31,2990 ; 3101.03,2984.53 ccw(c3101.03,3017.32) C32.2@3124.22,2994.13
  Top Layer w10: v1@2662.15,2805.22 ccw(c2653.61,2813.76) 2665.69,2813.76 ccw(c2677.76,2813.76) v1@2669.22,2805.22 ; C35.2@2662.26,2829.58 cw(c2653.99,2821.31) 2665.69,2821.31 cw(c2677.38,2821.31) C35.2@2669.11,2829.58 ; v1(2665.69,2801.69) C35.2@2665.69,2833 ; v1(2868.69,3185.31) C33.2@2900,3185.31 ; v1@2872.22,3181.78 cw(c2880.76,3173.24) 2880.76,3185.31 cw(c2880.76,3197.39) v1@2872.22,3188.85 ; C33.2@2896.58,3181.89 ccw(c2888.31,3173.62) 2888.31,3185.31 ccw(c2888.31,3197.01) C33.2@2896.58,3188.74 ; v1(2995.69,2985) U4.20@3035,2985 ; v1@2999.22,2981.46 cw(c3007.76,2972.93) 3007.76,2985 cw(c3007.76,2997.07) v1@2999.22,2988.54
  Bottom Layer w20: v1(2665.69,2801.69) 2925,2801.69 ; v1(2868.69,3185.31) 2868.69,3111.31 2925,3055 ; 2930,2985 v1(2995.69,2985)
  Bottom Layer w32: v1(2900,2680) v1(2925,2680) 2925,2801.69 2925,3055 ; v1@2902.55,2673.58 cw(c2928.34,2653.58) v1@2924.25,2685.95 ; v1@2904.24,2675.76 ccw(c2854.13,2725.87) 2925,2725.87 ; 2917.21,2697.41 ccw(c2943.11,2690.33) v1@2919.79,2677.03
NetC36_1: C36.1 R6.1 U4.10 Y2.2 | length 721.7
  Top Layer w8: U4.10@2968.9,2796.54 2968.9,2746.1 2975.58,2739.42 2975.58,2689.42 3019.68,2645.32 R6.1@3180,2645.32 3284.68,2645.32 3303,2627 ; 3129.37,2645.32 cw(c3129.37,2629.06) C36.1@3140.87,2640.55 ; 3132.42,2645.32 ccw(c3132.42,2657.27) C36.1@3140.87,2648.82 ; C36.1@3149.13,2640.55 cw(c3160.63,2629.06) 3160.63,2645.32 ; C36.1@3149.13,2648.82 ccw(c3157.58,2657.27) 3157.58,2645.32 ; R6.1@3174.48,2639.79 ccw(c3161.14,2626.46) 3161.14,2645.32 ccw(c3161.14,2664.17) R6.1@3174.48,2650.84 ; R6.1@3185.52,2639.79 cw(c3198.86,2626.46) 3198.86,2645.32 cw(c3198.86,2664.17) R6.1@3185.52,2650.84 ; Y2.2@3288.89,2603.22 ccw(c3275.91,2627) 3303,2627 ; Y2.2@3292.72,2596.2 ccw(c3283.27,2613.52) 3303,2613.52 ccw(c3322.73,2613.52) Y2.2@3313.28,2596.2 ; Y2.2@3303,2572.35 3303,2627 ; Y2.2@3317.11,2603.22 cw(c3330.09,2627) 3303,2627
NetC37_1: C37.1 R6.2 R7.2 Y2.1 | length 511.2
  Top Layer w8: R7.2@3069.69,2685 3290,2685 3303,2698 ; R7.2@3075.21,2679.48 cw(c3088.54,2666.14) 3088.54,2685 cw(c3088.54,2703.86) R7.2@3075.21,2690.52 ; 3130.13,2685 ccw(c3130.13,2700.18) C37.1@3140.87,2689.45 ; 3131.66,2685 cw(c3131.66,2671.97) C37.1@3140.87,2681.18 ; C37.1@3149.13,2681.18 cw(c3158.34,2671.97) 3158.34,2685 ; C37.1@3149.13,2689.45 ccw(c3159.87,2700.18) 3159.87,2685 ; 3160.38,2685 cw(c3160.38,2665.07) R6.2@3174.48,2679.16 ; 3161.9,2685 ccw(c3161.9,2702.78) R6.2@3174.48,2690.21 ; R6.2@3185.52,2679.16 cw(c3199.62,2665.07) 3199.62,2685 ; R6.2@3185.52,2690.21 ccw(c3198.1,2702.78) 3198.1,2685 ; Y2.1@3289.35,2720.53 cw(c3277.58,2698) 3303,2698 ; Y2.1@3293.06,2727.62 cw(c3284.48,2711.21) 3303,2711.21 cw(c3321.52,2711.21) Y2.1@3312.94,2727.62 ; Y2.1@3303,2741.65 3303,2698 ; Y2.1@3316.65,2720.53 ccw(c3328.42,2698) 3303,2698
NetC41_1: C41.1 C42.1 R13.1 R14.2 U4.16 U4.18 | length 610.4
  Top Layer w8: U4.16@3058.46,2905.79 3094.21,2905.79 3110,2890 3169.68,2890 ; U4.18@3058.46,2945.16 3149.84,2945.16 ; C41.1@3161.88,2915.13 ccw(c3120.77,2916.08) 3149.84,2945.16 ; 3163.07,2931.93 cw(c3146.62,2915.49) C41.1@3169.87,2914.95 ; C41.1@3175.78,2919.13 ccw(c3191.94,2935.28) 3191.94,2912.44 ; C41.1@3176.29,2918.71 cw(c3172.47,2914.89) C41.1@3177.87,2914.77 ; C41.1@3177.3,2916.49 ccw(c3182.56,2917.88) 3182.56,2912.44 ; C42.1@3204.72,2904.13 ccw(c3184.67,2884.08) 3184.67,2912.44 ccw(c3184.67,2940.8) C42.1@3204.72,2920.75 ; C42.1@3220,2912.44 C42.1@3215,2912.44 3182.56,2912.44 ; 3149.84,2945.16 3182.56,2912.44
  Top Layer w20: R14.2@3169.69,2865 3169.68,2890 C41.1@3169.68,2915 ccw(c3174.68,2915) 3174.68,2910 R13.1@3260.32,2910 ; C41.1@3171.54,2914.89 ccw(c3183.34,2926.69) 3183.34,2910 ; 3193.26,2910 ccw(c3193.26,2932.21) C42.1@3208.97,2916.51 ; C42.1@3221.03,2916.51 ccw(c3236.74,2932.21) 3236.74,2910
NetC41_2: C41.2 C42.2 R11.1 U4.17 U4.19 | length 518.9
  Top Layer w8: C41.2@3124.22,2910.87 ccw(c3114.24,2900.89) 3114.24,2915 ccw(c3114.24,2929.1) C41.2@3124.22,2919.13 ; C41.2@3130.31,2915 3110,2915 3099.53,2925.47 U4.17@3058.46,2925.47 3024.53,2925.47 cw(c3024.53,2945) 3005,2945 cw(c3024.84,2945) 3024.84,2964.84 U4.19@3058.46,2964.84 3165.16,2964.84 3175,2955 ; C42.2@3217.5,2965.06 C42.2@3220,2967.56
  Top Layer w20: 3175,2955 3175,2955.32 ; C42.2@3208.59,2971.2 cw(c3175,2998.76) 3175,2955.32 ; C42.2@3221.06,2971.6 ccw(c3260,3010.02) R11.1@3260,2955.32 3175,2955.32
NetC45_2: C45.2 R16.2 U4.37 | length 297.9
  Top Layer w8: R16.2@2619.87,3070.18 ccw(c2636.56,3086.87) 2636.56,3063.27 ; R16.2@2625.52,3075.84 ccw(c2655.87,3106.19) C45.2@2655.87,3063.27 ; 2644.26,3066.38 ccw(c2645.84,3072.29) C45.2@2651.72,3070.63 ; 2644.74,3063.27 cw(c2644.74,3049.15) C45.2@2654.72,3059.13 ; 2645.13,3063.27 ccw(c2645.13,3083.71) C45.2@2660.26,3069.96 ; C45.2@2654.34,3075.34 cw(c2627.05,3100.14) 2627.05,3063.27 U4.37@2741.54,3063.27 ; C45.2@2669.62,3070.09 ccw(c2686.09,3086.56) 2686.09,3063.27 ; C45.2@2675.28,3059.13 cw(c2685.26,3049.15) 2685.26,3063.27 ; C45.2@2675.28,3075.75 ccw(c2705.41,3105.88) 2705.41,3063.27
NetC53_2: C53.2 C67.2 R23.2 U5.19 | length 279.1
  Top Layer w10: C53.2@2401.26,3106.58 cw(c2392.99,3098.31) 2404.69,3098.31 cw(c2416.38,3098.31) C53.2@2408.11,3106.58 ; C53.2@2410.08,3106.58 cw(c2418.34,3098.31) 2418.34,3110 cw(c2418.34,3121.69) C53.2@2410.08,3113.42 ; C53.2@2415.73,3110 ccw(c2415.73,3144.59) R23.2@2440.18,3120.13 ; U5.19@2418.66,3014.13 2418.66,3066.34 2404.69,3080.31 C53.2@2404.69,3110 2439.69,3110 R23.2@2445,3115.31
  Top Layer w11.81: U5.19@2418.66,3019.05 2418.66,3030.59
  Top Layer w20: C67.2@2398.49,3148.97 cw(c2383.55,3134.02) 2404.69,3134.02 ; C53.2@2404.69,3110 C67.2@2404.69,3152.87
NetC54_2: C54.2 C68.2 R24.2 U5.1 | length 236.2
  Top Layer w10: C54.2@2316.58,2775.08 ccw(c2307.74,2783.91) 2320.24,2783.91 ; C54.2@2320.24,2769.69 U5.1@2320.24,2844.84 ; 2320.24,2782.77 ccw(c2331.12,2782.77) C54.2@2323.42,2775.08
  Top Layer w15: R24.2@2220,2769.69 C54.2@2320,2769.69 ; 2242.99,2769.69 cw(c2242.99,2742.51) C68.2@2262.2,2761.73 ; C68.2@2277.8,2761.73 cw(c2297.01,2742.51) 2297.01,2769.69
NetC57_1: C57.1 R27.2 R29.2 R30.1 | length 300.7
  Top Layer w10: R29.2@1140,2959.69 R30.1@1190,2959.68 C57.1@1240,2959.68 R27.2@1240,3020.31 ; R29.2@1144.82,2954.87 cw(c1156.44,2943.24) 1156.44,2959.69 cw(c1156.44,2976.13) R29.2@1144.82,2964.5 ; R30.1@1185.18,2954.87 ccw(c1173.56,2943.24) 1173.56,2959.69 ccw(c1173.56,2976.13) R30.1@1185.18,2964.5 ; R30.1@1194.82,2954.87 cw(c1206.44,2943.24) 1206.44,2959.68 cw(c1206.44,2976.13) R30.1@1194.82,2964.5 ; R27.2@1235.18,3015.5 cw(c1223.56,3003.87) 1240,3003.87 cw(c1256.44,3003.87) R27.2@1244.82,3015.5 ; C57.1@1236.58,2956.26 ccw(c1228.31,2947.99) 1228.31,2959.68 ccw(c1228.31,2971.38) C57.1@1236.58,2963.11 ; C57.1@1236.58,2965.08 ccw(c1228.31,2973.34) 1240,2973.34 ccw(c1251.69,2973.34) C57.1@1243.42,2965.08
NetC60_1: C60.1 R42.2 R44.2 R46.1 | length 295.4
  Top Layer w8: R44.2@840,2963.62 940,2963.62 R42.2@940,3016.38 ; R44.2@845.52,2954.16 cw(c868.36,2931.32) 868.36,2963.62 ; 871.14,2963.62 cw(c871.14,2942.8) C60.1@885.87,2957.52 ; C60.1@894.13,2957.52 cw(c908.86,2942.8) 908.86,2963.62 ; 911.64,2963.62 cw(c911.64,2931.32) R46.1@934.48,2954.16 ; R46.1@934.48,2965.21 ccw(c921.14,2978.54) 940,2978.54 ccw(c958.86,2978.54) R46.1@945.52,2965.21 ; R42.2@934.48,3014.79 cw(c921.14,3001.46) 940,3001.46 cw(c958.86,3001.46) R42.2@945.52,3014.79
NetC65_1: C65.1 R57.2 R60.2 R61.1 | length 297
  Top Layer w8: R60.2@550,2963.62 650,2963.62 R57.2@650,3016.38 ; R60.2@555.52,2954.16 cw(c578.36,2931.32) 578.36,2963.62 ; 571.64,2963.62 cw(c571.64,2931.32) R61.1@594.48,2954.16 ; R61.1@605.52,2954.16 cw(c628.36,2931.32) 628.36,2963.62 ; 631.14,2963.62 cw(c631.14,2942.8) C65.1@645.87,2957.52 ; R57.2@644.48,3014.79 cw(c631.14,3001.46) 650,3001.46 cw(c668.86,3001.46) R57.2@655.52,3014.79 ; C65.1@645.87,2965.78 ccw(c635.9,2975.76) 650,2975.76 ccw(c664.11,2975.76) C65.1@654.13,2965.78
NetD1_1: D1.1 FAN3.3 R25.2 R27.1 | length 907.2
  Top Layer w8: FAN3.3@1141.73,3349.67 cw(c1141.73,3288.04) 1185.31,3331.62 cw(c1228.89,3375.2) FAN3.3@1167.26,3375.2 ; FAN3.3@1141.73,3357.67 cw(c1141.73,3315.35) 1171.65,3345.28 cw(c1201.57,3375.2) FAN3.3@1159.26,3375.2 ; FAN3.3@1141.73,3375.2 1267,3249.93 1267,3127 1256.38,3116.38 ; R27.1@1234.48,3065.21 ccw(c1221.14,3078.54) 1240,3078.54 ccw(c1258.86,3078.54) R27.1@1245.52,3065.21 ; R25.2@1234.48,3114.79 cw(c1221.14,3101.46) 1240,3101.46 cw(c1258.86,3101.46) R25.2@1245.52,3114.79 ; R27.1@1240,3063.62 1240,3116.38 1256.38,3116.38 ; R25.2@1247.4,3122.82 ccw(c1256.38,3125.86) 1256.38,3116.38
  Top Layer w20: D1.1@1146.92,3042.15 cw(c1179.43,3028.27) D1.1@1179.43,3063.62 ; D1.1@1160,3034.88 1188.74,3063.62 1240,3063.62 ccw(c1240,3002.42) D1.1@1183.71,3026.44 ; D1.1@1165.31,3034.29 cw(c1209.72,3015.34) 1209.72,3063.62 ; 1225.92,3059.85 cw(c1230.42,3043.08) R27.1@1239.09,3058.12 ; 1226.12,3063.62 cw(c1226.12,3045.81) R27.1@1238.72,3058.4
NetD2_1: D2.1 FAN2.3 R38.2 R42.1 | length 852.2
  Top Layer w8: FAN2.3@826.77,3349.67 cw(c826.77,3288.04) 870.35,3331.62 cw(c913.93,3375.2) FAN2.3@852.3,3375.2 ; FAN2.3@826.77,3357.67 cw(c826.77,3315.35) 856.69,3345.28 cw(c886.61,3375.2) FAN2.3@844.3,3375.2 ; FAN2.3@826.77,3375.2 970,3231.97 970,3130 960.31,3120.31 R38.2@940,3120.31 ; R42.1@934.48,3065.21 ccw(c921.14,3078.54) 940,3078.54 ccw(c958.86,3078.54) R42.1@945.52,3065.21 ; R38.2@934.48,3114.79 cw(c921.14,3101.46) 940,3101.46 cw(c958.86,3101.46) 945.52,3114.79 cw(c958.86,3101.46) 958.86,3120.31 cw(c958.86,3139.17) R38.2@945.52,3125.84 ; R42.1@940,3063.62 R38.2@940,3116.38
  Top Layer w20: D2.1@870,3034.88 898.74,3063.62 940,3063.62 ccw(c940,3016.56) D2.1@894.65,3029.14 ; D2.1@875.38,3034.48 cw(c913.7,3023.86) 913.7,3063.62 ; 926.12,3063.62 cw(c926.12,3045.81) R42.1@938.72,3058.4
NetD3_1: D3.1 FAN1.3 R50.2 R57.1 | length 855.1
  Top Layer w8: FAN1.3@511.81,3349.67 cw(c511.81,3288.04) 555.39,3331.62 cw(c598.97,3375.2) FAN1.3@537.34,3375.2 ; FAN1.3@511.81,3357.67 cw(c511.81,3315.35) 541.73,3345.28 cw(c571.65,3375.2) FAN1.3@529.34,3375.2 ; FAN1.3@511.81,3375.2 680,3207.01 680,3125 671.38,3116.38 ; R57.1@644.48,3065.21 ccw(c631.14,3078.54) 650,3078.54 ccw(c668.86,3078.54) R57.1@655.52,3065.21 ; R50.2@644.48,3114.79 cw(c631.14,3101.46) 650,3101.46 cw(c668.86,3101.46) R50.2@655.52,3114.79 ; R57.1@650,3063.62 650,3116.38 671.38,3116.38 ; R50.2@656.59,3124.5 ccw(c671.38,3133.89) 671.38,3116.38
  Top Layer w20: D3.1@580,3034.88 608.74,3063.62 650,3063.62 ccw(c650,3016.56) D3.1@604.65,3029.14 ; D3.1@585.38,3034.48 cw(c623.7,3023.86) 623.7,3063.62 ; 636.12,3063.62 cw(c636.12,3045.81) R57.1@648.72,3058.4
NetDONE_2: DONE.2 R55.1 | length 160.4
  Top Layer w8: R55.1@2088,2520.62 DONE.2@2143.16,2520.62 ; R55.1@2092.85,2520.62 cw(c2092.85,2475.28) DONE.2@2124.91,2507.34 ; R55.1@2093.52,2511.16 cw(c2116.36,2488.32) DONE.2@2116.36,2520.62 ; 2103.42,2520.62 ccw(c2103.42,2551.02) DONE.2@2124.91,2529.52 ; 2112.16,2520.62 cw(c2112.16,2494.6) DONE.2@2130.57,2513
NetFAN1_4: FAN1.4 R53.1 R58.1 | length 546.5
  Top Layer w8: R53.1@450,2963.62 v1(475,2963.62) ; R53.1@456.01,2954.7 cw(c475,2938.96) v1(475,2963.62) ; v1@469.55,2966.12 cw(c459.93,2970.54) 462.67,2960.32 cw(c465.41,2950.1) v1@471.53,2958.73 ; v1@470.76,2959.38 ccw(c460.51,2949.14) 460.51,2963.62 ccw(c460.51,2978.11) v1@470.76,2967.86 ; v1@478.47,2958.73 cw(c484.59,2950.1) 487.33,2960.32 cw(c490.07,2970.54) v1@480.45,2966.12 ; v1@479.24,2959.38 cw(c489.49,2949.14) 489.49,2963.62 cw(c489.49,2978.11) v1@479.24,2967.86 ; R58.1@493.99,2954.7 ccw(c475,2938.96) v1(475,2963.62) ; R58.1@500,2963.62 v1(475,2963.62)
  Bottom Layer w8: v1(475,2963.62) 537,3025.62 537,3250.01 FAN1.4@511.81,3275.2 ; v1@475,2969.62 ccw(c475,2984.11) 485.24,2973.86 ccw(c495.49,2963.62) v1@481,2963.62
NetFAN2_4: FAN2.4 R41.1 R43.1 | length 710.1
  Top Layer w8: R41.1@736,2963.62 v1(762,2963.62) ; R41.1@741.86,2954.52 cw(c762,2936.79) v1(762,2963.62) ; v1@756.72,2966.46 cw(c745.2,2972.66) 748.58,2960.03 cw(c751.97,2947.4) v1@758.84,2958.52 ; v1@757.76,2959.38 ccw(c747.51,2949.14) 747.51,2963.62 ccw(c747.51,2978.11) v1@757.76,2967.86 ; v1@765.16,2958.52 cw(c772.03,2947.4) 775.42,2960.03 cw(c778.8,2972.66) v1@767.28,2966.46 ; v1@766.24,2959.38 cw(c776.49,2949.14) 776.49,2963.62 cw(c776.49,2978.11) v1@766.24,2967.86 ; R43.1@782.14,2954.52 ccw(c762,2936.79) v1(762,2963.62) ; R43.1@788,2963.62 v1(762,2963.62)
  Bottom Layer w8: v1(762,2963.62) 826.77,3028.39 FAN2.4@826.77,3275.2 ; v1@762,2969.62 ccw(c762,2984.11) 772.24,2973.86 ccw(c782.49,2963.62) v1@768,2963.62 ; FAN2.4@808.72,3257.15 cw(c765.14,3213.57) 826.77,3213.57 cw(c888.4,3213.57) FAN2.4@844.82,3257.15 ; FAN2.4@814.38,3262.8 cw(c784.46,3232.88) 826.77,3232.88 cw(c869.09,3232.88) FAN2.4@839.17,3262.8
NetFAN3_4: FAN3.4 R26.1 R28.1 | length 542.1
  Top Layer w8: R26.1@1040,2963.62 v1(1065,2963.62) ; R26.1@1046.01,2954.7 cw(c1065,2938.96) v1(1065,2963.62) ; v1@1059.55,2966.12 cw(c1049.93,2970.54) 1052.67,2960.32 cw(c1055.41,2950.1) v1@1061.53,2958.73 ; v1@1060.76,2959.38 ccw(c1050.51,2949.14) 1050.51,2963.62 ccw(c1050.51,2978.11) v1@1060.76,2967.86 ; v1@1068.47,2958.73 cw(c1074.59,2950.1) 1077.33,2960.32 cw(c1080.07,2970.54) v1@1070.45,2966.12 ; v1@1069.24,2959.38 cw(c1079.49,2949.14) 1079.49,2963.62 cw(c1079.49,2978.11) v1@1069.24,2967.86 ; R28.1@1083.99,2954.7 ccw(c1065,2938.96) v1(1065,2963.62) ; R28.1@1090,2963.62 v1(1065,2963.62)
  Bottom Layer w8: v1(1065,2963.62) 1115,3013.62 1115,3248.46 FAN3.4@1141.73,3275.2 ; v1@1065,2969.62 ccw(c1065,2984.11) 1075.24,2973.86 ccw(c1085.49,2963.62) v1@1071,2963.62
NetJ2_2: J2.2 R66.1 | length 257.2
  Top Layer w10: J2.2@2672,2535 R66.1@2755.32,2535 ; J2.2@2682.27,2524.73 cw(c2707.07,2499.93) 2707.07,2535 cw(c2707.07,2570.07) J2.2@2682.27,2545.27 ; J2.2@2689.34,2517.66 cw(c2731.21,2475.79) 2731.21,2535 cw(c2731.21,2594.21) J2.2@2689.34,2552.34 ; R66.1@2750.5,2530.18 ccw(c2738.87,2518.56) 2738.87,2535 ccw(c2738.87,2551.44) R66.1@2750.5,2539.82
NetJTAG1_3: JTAG1.3 RN2.5 | length 389.1
  Top Layer w8: JTAG1.3@848,1403 905,1460 990,1460 1002.76,1472.76 RN2.5@1002.76,1496.47 ; JTAG1.3@848,1420.53 ccw(c848,1462.84) 877.92,1432.92 ccw(c907.84,1403) JTAG1.3@865.53,1403 ; JTAG1.3@848,1428.53 ccw(c848,1490.16) 891.58,1446.58 ccw(c935.16,1403) JTAG1.3@873.53,1403 ; RN2.5@999.32,1488.12 cw(c991.03,1479.82) 1002.76,1479.82 cw(c1014.48,1479.82) RN2.5@1006.19,1488.12
NetJTAG1_4: JTAG1.4 RN2.6 | length 261.1
  Top Layer w8: JTAG1.4@948,1403 981.13,1436.13 1001.13,1436.13 1034.25,1469.25 RN2.6@1034.25,1496.47 ; JTAG1.4@951.7,1420.13 ccw(c956.07,1440.41) 970.74,1425.74 ccw(c985.41,1411.07) JTAG1.4@965.13,1406.7 ; JTAG1.4@953.38,1427.95 ccw(c959.76,1457.49) 981.12,1436.12 ccw(c1002.49,1414.76) JTAG1.4@972.95,1408.38 ; RN2.6@1030.82,1488.12 cw(c1022.52,1479.82) 1034.25,1479.82 cw(c1045.98,1479.82) RN2.6@1037.69,1488.12
NetJTAG1_5: JTAG1.5 RN2.7 | length 155.6
  Top Layer w8: JTAG1.5@1038.43,1426.67 ccw(c1032.69,1440.86) 1048,1440.86 ; JTAG1.5@1048,1403 1048,1440.86 ; JTAG1.5@1057.57,1426.67 cw(c1063.31,1440.86) 1048,1440.86 ; RN2.7@1062.31,1488.12 cw(c1054.02,1479.82) 1065.75,1479.82 cw(c1077.48,1479.82) RN2.7@1069.18,1488.12 ; RN2.7@1065.75,1496.47 1065.75,1458.61 1048,1440.86
NetJTAG1_6: JTAG1.6 RN2.8 | length 296.2
  Top Layer w8: RN2.8@1093.81,1488.12 cw(c1085.52,1479.82) 1097.24,1479.82 cw(c1108.97,1479.82) RN2.8@1100.68,1488.12 ; RN2.8@1097.24,1496.47 1097.24,1453.76 JTAG1.6@1148,1403 ; JTAG1.6@1122.47,1403 ccw(c1060.84,1403) 1104.42,1446.58 ccw(c1148,1490.16) JTAG1.6@1148,1428.53 ; JTAG1.6@1130.47,1403 ccw(c1088.16,1403) 1118.08,1432.92 ccw(c1148,1462.84) JTAG1.6@1148,1420.53
NetLED1_1: LED1.1 RN1.4 | length 157.7
  Top Layer w8: LED1.1@863.46,1640 900,1640 ; LED1.1@877.24,1629.67 cw(c900,1609.76) 900,1640 ; LED1.1@877.24,1650.33 ccw(c900,1670.24) 900,1640 ; RN1.4@917.04,1679.32 cw(c909.88,1672.17) 920,1672.17 ; 920,1669.89 cw(c933.34,1669.89) RN1.4@923.91,1679.32 ; RN1.4@920.47,1682.76 920,1682.28 920,1660 900,1640
NetLED2_1: LED2.1 RN1.3 | length 194.4
  Top Layer w8: LED2.1@865.17,1700.17 cw(c891.06,1683.42) 891.06,1714.25 ; LED2.1@871.88,1695.82 cw(c905.76,1673.9) 905.76,1714.25 ; LED2.1@877.72,1714.25 RN1.3@920.47,1714.25 ccw(c920.47,1664.38) LED2.1@878.6,1691.48 ; 901.58,1709.19 ccw(c897.42,1724.72) RN1.3@911.34,1716.68 ; RN1.3@912.12,1710.82 ccw(c903.82,1702.52) 903.82,1714.25 ccw(c903.82,1725.98) RN1.3@912.12,1717.69
NetLED3_1: LED3.1 RN1.2 | length 194.4
  Top Layer w8: LED3.1@865.17,1759.83 ccw(c891.06,1776.58) 891.06,1745.75 ; LED3.1@871.88,1764.18 ccw(c905.76,1786.1) 905.76,1745.75 ; LED3.1@877.72,1745.75 RN1.2@920.47,1745.75 cw(c920.47,1795.62) LED3.1@878.6,1768.52 ; 901.58,1750.81 cw(c897.42,1735.28) RN1.2@911.34,1743.32 ; RN1.2@912.12,1742.31 ccw(c903.82,1734.02) 903.82,1745.75 ccw(c903.82,1757.48) RN1.2@912.12,1749.18
NetLED4_1: LED4.1 RN1.1 | length 171.5
  Top Layer w8: LED4.1@863.46,1820 910,1820 920.47,1809.53 RN1.1@920.47,1777.24 ; LED4.1@876.52,1808.91 cw(c903.3,1782.13) 903.3,1820 cw(c903.3,1857.87) LED4.1@876.52,1831.09 ; RN1.1@917.04,1780.68 ccw(c908.74,1788.97) 920.47,1788.97 ccw(c932.2,1788.97) RN1.1@923.91,1780.68
NetP1_4: P1.4 R62.1 | length 571.1
  Top Layer w6: P1.4@2851.77,1402.28 cw(c2831.24,1373) 2867,1373 ; P1.4@2855.22,1407.19 cw(c2839.33,1384.54) 2867,1384.54 cw(c2894.67,1384.54) P1.4@2878.78,1407.19 ; P1.4@2867,1424 2867,1373 ; P1.4@2882.23,1402.28 ccw(c2902.76,1373) 2867,1373 ; R62.1@3163.77,1285.92 ccw(c3148.73,1300.96) 3170,1300.96 ccw(c3191.27,1300.96) R62.1@3176.23,1285.92 ; R62.1@3170,1280 3170,1320 3133,1357 2883,1357 2867,1373
NetP1_5: P1.5 R63.1 | length 631.1
  Top Layer w6: P1.5@2751.77,1402.28 cw(c2731.24,1373) 2767,1373 ; P1.5@2755.22,1407.19 cw(c2739.33,1384.54) 2767,1384.54 cw(c2794.67,1384.54) P1.5@2778.78,1407.19 ; P1.5@2767,1424 2767,1373 ; P1.5@2782.23,1402.28 ccw(c2802.76,1373) 2767,1373 ; R63.1@3123.77,1285.92 ccw(c3108.73,1300.96) 3130,1300.96 ccw(c3151.27,1300.96) R63.1@3136.23,1285.92 ; R63.1@3130,1280 3130,1320 3104,1346 2794,1346 2767,1373
NetP1_6: P1.6 R64.1 | length 662.6
  Top Layer w6: P1.6@2653.71,1401.04 cw(c2640.38,1378) 2667,1378 ; P1.6@2656.72,1406.23 cw(c2646.4,1388.41) 2667,1388.41 cw(c2687.6,1388.41) P1.6@2677.28,1406.23 ; P1.6@2667,1424 2667,1378 ; P1.6@2680.29,1401.04 ccw(c2693.62,1378) 2667,1378 ; R64.1@3083.77,1285.92 ccw(c3068.73,1300.96) 3090,1300.96 ccw(c3111.27,1300.96) R64.1@3096.23,1285.92 ; R64.1@3090,1279.68 3090,1315 3070,1335 2710,1335 2667,1378
NetQ1_1: Q1.1 R9.2 | length 149.8
  Top Layer w8: R9.2@841.98,2671.23 ccw(c834.84,2680.68) 846.69,2680.68 ; R9.2@846.53,2664.89 cw(c857.78,2672.54) 848.16,2682.16 ; R9.2@846.69,2665 846.69,2680.69 ; R9.2@851.39,2671.23 cw(c858.53,2680.68) 846.69,2680.68 ; R9.2@853.15,2669.39 cw(c865.92,2678.07) 855,2689 ; 855,2687.52 cw(c868.18,2687.52) Q1.1@864.68,2700.23 ; Q1.1@855,2698.03 cw(c865.28,2698.03) Q1.1@862.55,2707.94 ; Q1.1@862.6,2715.63 855,2708.03 855,2689 ; 846.69,2680.69 855,2689
NetQ2_1: Q2.1 R21.2 | length 135.9
  Top Layer w8: R21.2@1954.79,2725.52 ccw(c1941.46,2738.86) 1960.31,2738.86 ccw(c1979.17,2738.86) R21.2@1965.84,2725.52 ; R21.2@1960.31,2720 1960.31,2759.31 1972.63,2771.63 Q2.1@1992.6,2771.63 ; Q2.1@1987.08,2766.11 ccw(c1973.74,2752.77) 1973.74,2771.63 ccw(c1973.74,2790.49) Q2.1@1987.08,2777.15
NetR2_2: R2.2 Y1.3 | length 266.2
  Top Layer w8: Y1.3@1403.82,1773.23 R2.2@1492.09,1773.23 ; Y1.3@1430.57,1762.23 cw(c1457.13,1735.67) 1457.13,1773.23 cw(c1457.13,1810.79) Y1.3@1430.57,1784.23 ; Y1.3@1436.23,1756.57 cw(c1476.44,1716.35) 1476.44,1773.23 cw(c1476.44,1830.11) Y1.3@1436.23,1789.89 ; 1472.18,1773.23 ccw(c1472.18,1798.13) R2.2@1489.79,1780.52 ; 1480.73,1773.23 cw(c1480.73,1760.42) R2.2@1489.79,1769.48